# Altium PCB LOAD CONTROL_Final2.PcbDoc (part 1 of 2)
Units mm, origin at the board's own origin, x right, y up, seen from the top; angles counter-clockwise.
Board outline 51.64 x 106.92 mm, 2 copper layers (Top Layer, Bottom Layer); 84 components, 58 nets, 283 pads, 102 vias.
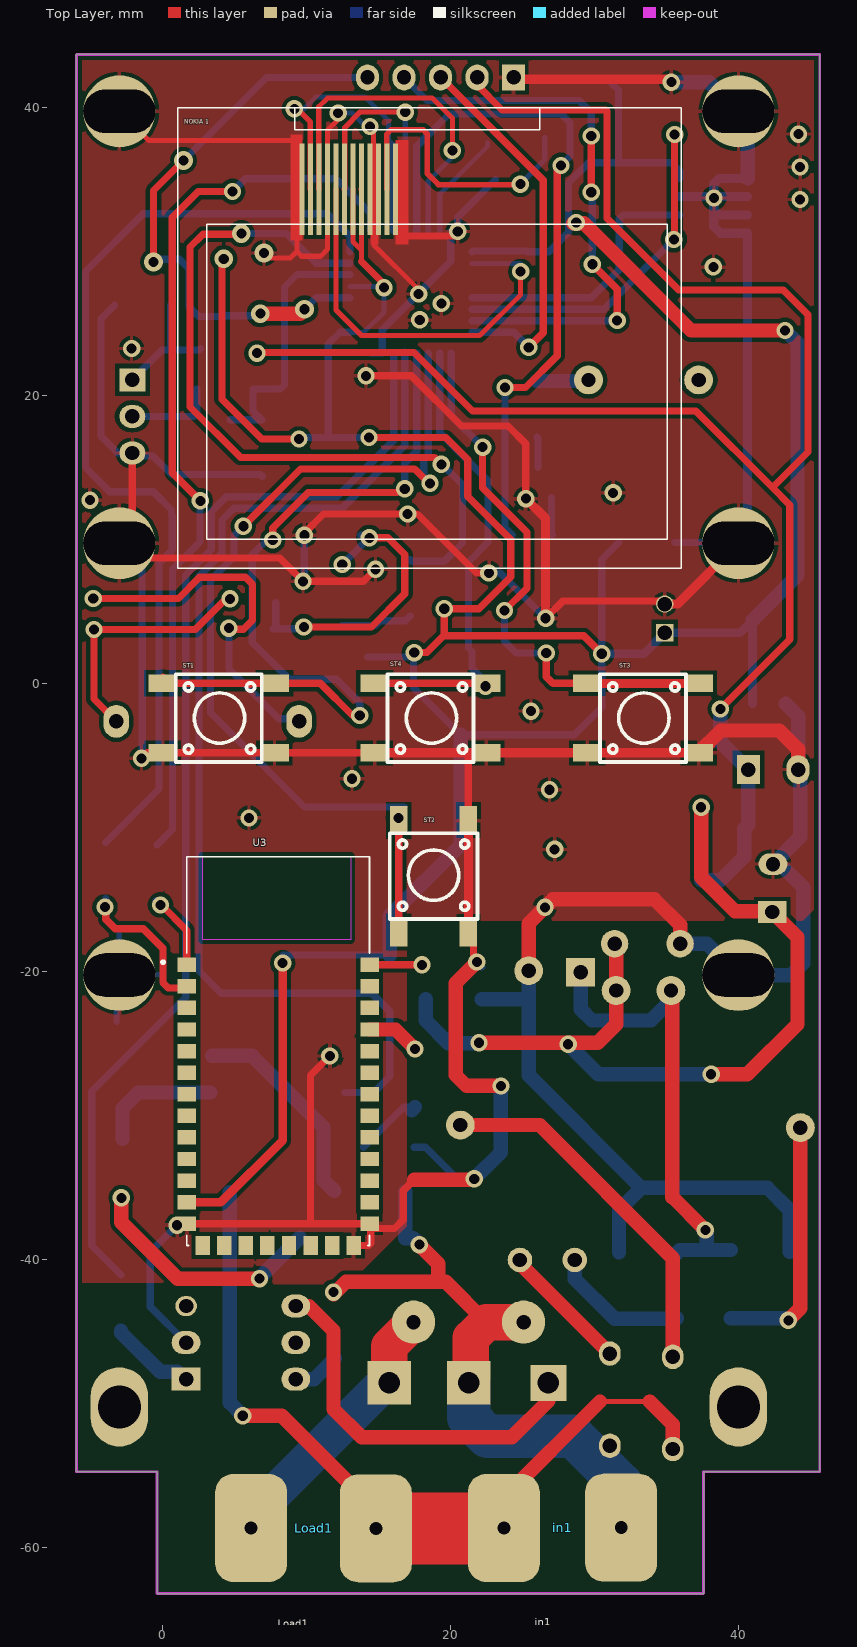
[diagram p0: Top Layer view]
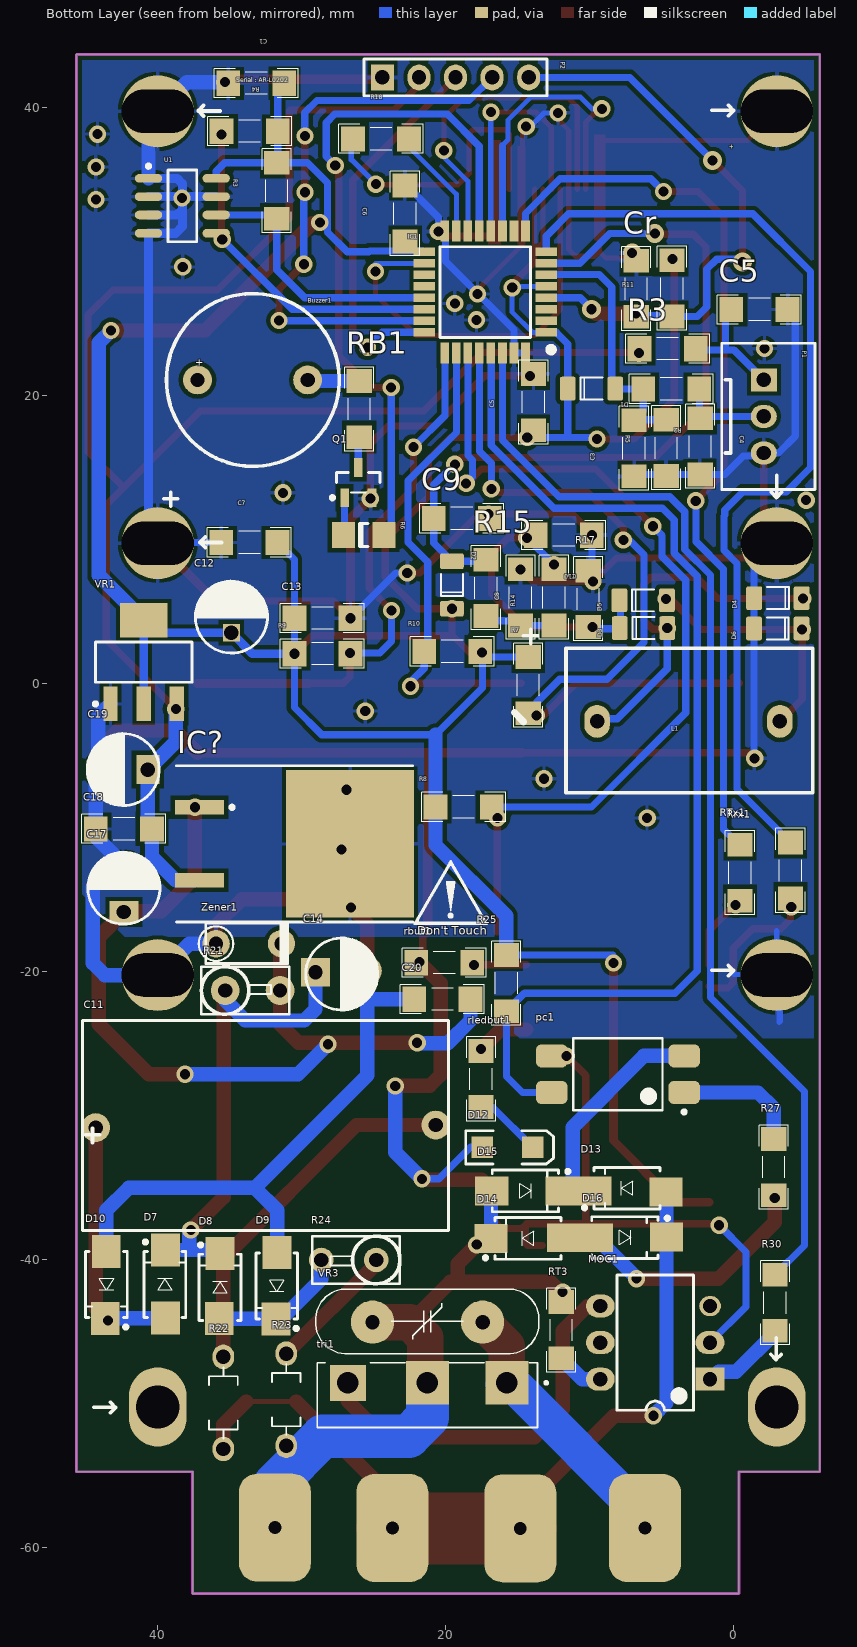
[diagram p1: Bottom Layer view, seen from below]
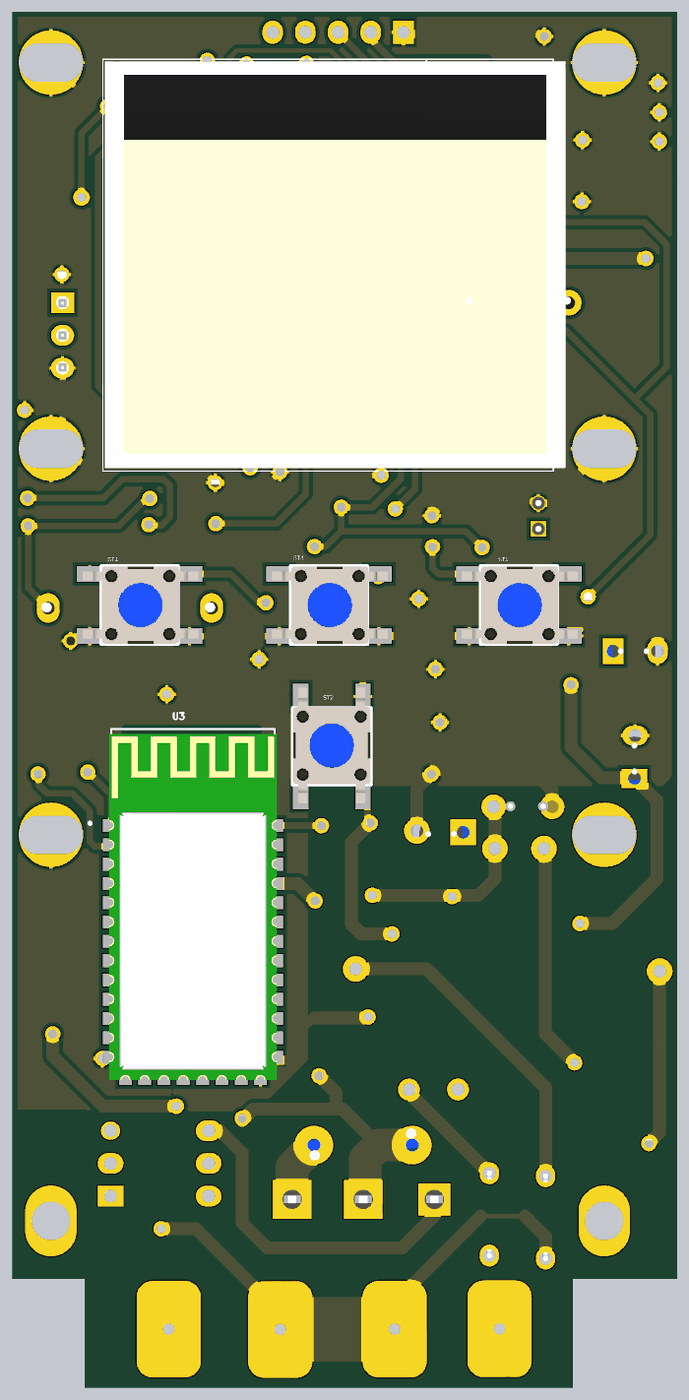
[diagram p2: 3D render of the assembled board from above, using the file's embedded part models]
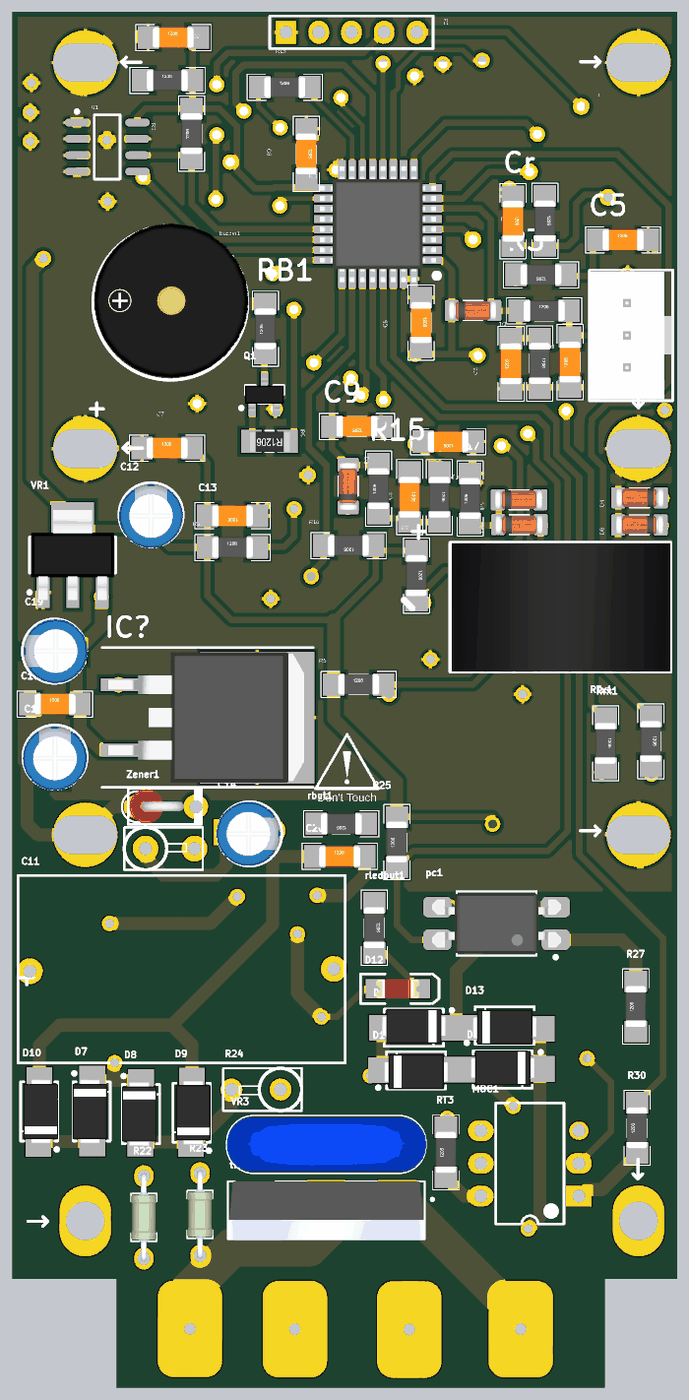
[diagram p3: 3D render of the assembled board from below, using the file's embedded part models]

## Layer stack, top to bottom
Top Solder: solder mask 0.0102, Solder Resist, Dk 3.5
Top Layer: signal copper 0.0356
Dielectric 1: dielectric 0.32, FR-4, Dk 4.8
Bottom Layer: signal copper 0.0356
Bottom Solder: solder mask 0.0102, Solder Resist, Dk 3.5

## Board outline
-0.358,-63.231 -0.358,-54.77 -5.969,-54.77 -5.969,43.686 45.666,43.686 45.666,-54.77 37.592,-54.77 37.592,-63.231

## Design rules (kind name [scope] priority, off if disabled: settings)
Clearance Clearance_15 [InNamedPolygon('GND_L02_P008')] p1: gap=0.3 ignorepadtopadclearanceinfootprint=TRUE
Clearance Clearance_14 [InNamedPolygon('GND_L01_P006')] p2: gap=0.381 ignorepadtopadclearanceinfootprint=TRUE
Clearance Clearance_13 [InNamedPolygon('GND_L01_P006')] p3: gap=0.381 ignorepadtopadclearanceinfootprint=TRUE
Clearance Clearance_12 [InNamedPolygon('GND_L01_P006')] p4: gap=0.2 ignorepadtopadclearanceinfootprint=FALSE
Clearance Clearance_11 [InNamedPolygon('GND_L01_P006')] p5: gap=0.254 ignorepadtopadclearanceinfootprint=FALSE except(0: Arc-Hole Track-Hole SMDPad-Hole THPad-Hole Via-Hole Fill-Hole Poly-Hole Region-Hole Text-Hole)
Clearance Clearance_10 [InNamedPolygon('GND_L02_P008')] p6: gap=0.5 ignorepadtopadclearanceinfootprint=FALSE
Clearance Clearance_9 [InNamedPolygon('GND_L01_P006')] p7: gap=0.5 ignorepadtopadclearanceinfootprint=FALSE
Clearance Clearance_8 [InNamedPolygon('GND_L01_P006')] p8: gap=0.254 ignorepadtopadclearanceinfootprint=FALSE except(0: Arc-Hole Track-Hole SMDPad-Hole THPad-Hole Via-Hole Fill-Hole Poly-Hole Region-Hole Text-Hole)
Clearance Clearance_7 [InNamedPolygon('GND_L01_P006')] p9: gap=0.5 ignorepadtopadclearanceinfootprint=FALSE
Clearance Clearance_6 [InNamedPolygon('GND_L01_P006')] p10: gap=0.254 ignorepadtopadclearanceinfootprint=FALSE except(0: Arc-Hole Track-Hole SMDPad-Hole THPad-Hole Via-Hole Fill-Hole Poly-Hole Region-Hole Text-Hole)
Clearance 0 [InNamedPolygon('GND_L01_P006')] p11: gap=0.254 ignorepadtopadclearanceinfootprint=FALSE except(0: Arc-Hole Track-Hole SMDPad-Hole THPad-Hole Via-Hole Fill-Hole Poly-Hole Region-Hole Text-Hole)
Clearance Clearance_5 [InNamedPolygon('GND_L01_P006')] p12: gap=0.254 ignorepadtopadclearanceinfootprint=FALSE except(0: Arc-Hole Track-Hole SMDPad-Hole THPad-Hole Via-Hole Fill-Hole Poly-Hole Region-Hole Text-Hole)
Clearance Clearance_4 [InNamedPolygon('GND-E_L02_P002')] p13: gap=0.508 ignorepadtopadclearanceinfootprint=FALSE
Clearance Clearance_3 [InNamedPolygon('GND_L01_P001')] p14: gap=0.635 ignorepadtopadclearanceinfootprint=FALSE
Clearance Clearance_2 [InNamedPolygon('GND_L02_P000')] p15: gap=0.508 ignorepadtopadclearanceinfootprint=FALSE
Clearance Clearance_1 [InNamedPolygon('Bottom Layer-GND')] p16: gap=0.356 ignorepadtopadclearanceinfootprint=FALSE
Clearance [All] p17: gap=0.3 ignorepadtopadclearanceinfootprint=FALSE
PolygonConnect PolygonConnect_14 [All vs IsNamedPolygon('GND_L02_P008')] p1: thpad.connectstyle=Relief thpad.reliefconductorwidth=0.762 thpad.reliefentries=4 thpad.polygonreliefangle="90 Angle" thpad.airgapwidth=0.254 smdpad.connectstyle=Relief smdpad.reliefconductorwidth=0.508 smdpad.reliefentries=4 smdpad.polygonreliefangle="90 Angle" smdpad.airgapwidth=0.254 via.connectstyle=Direct via.reliefconductorwidth=0.254 via.reliefentries=4 via.polygonreliefangle="90 Angle" via.airgapwidth=0.254
PolygonConnect PolygonConnect_13 [All vs IsNamedPolygon('GND_L01_P006')] p2: thpad.connectstyle=Relief thpad.reliefconductorwidth=0.889 thpad.reliefentries=4 thpad.polygonreliefangle="90 Angle" thpad.airgapwidth=0.254 smdpad.connectstyle=Relief smdpad.reliefconductorwidth=0.635 smdpad.reliefentries=4 smdpad.polygonreliefangle="90 Angle" smdpad.airgapwidth=0.254 via.connectstyle=Direct via.reliefconductorwidth=0.254 via.reliefentries=4 via.polygonreliefangle="90 Angle" via.airgapwidth=0.254
PolygonConnect PolygonConnect_12 [All vs IsNamedPolygon('GND_L01_P006')] p3: thpad.connectstyle=Relief thpad.reliefconductorwidth=0.889 thpad.reliefentries=4 thpad.polygonreliefangle="90 Angle" thpad.airgapwidth=0.254 smdpad.connectstyle=Relief smdpad.reliefconductorwidth=0.508 smdpad.reliefentries=4 smdpad.polygonreliefangle="90 Angle" smdpad.airgapwidth=0.254 via.connectstyle=Direct via.reliefconductorwidth=0.254 via.reliefentries=4 via.polygonreliefangle="90 Angle" via.airgapwidth=0.254
PolygonConnect PolygonConnect_11 [All vs IsNamedPolygon('GND_L01_P006')] p4: thpad.connectstyle=Relief thpad.reliefconductorwidth=0.508 thpad.reliefentries=4 thpad.polygonreliefangle="90 Angle" thpad.airgapwidth=0.254 smdpad.connectstyle=Relief smdpad.reliefconductorwidth=0.508 smdpad.reliefentries=4 smdpad.polygonreliefangle="90 Angle" smdpad.airgapwidth=0.254 via.connectstyle=Direct via.reliefconductorwidth=0.254 via.reliefentries=4 via.polygonreliefangle="90 Angle" via.airgapwidth=0.254
PolygonConnect PolygonConnect_10 [All vs IsNamedPolygon('GND_L01_P006')] p5: thpad.connectstyle=Relief thpad.reliefconductorwidth=0.254 thpad.reliefentries=4 thpad.polygonreliefangle="90 Angle" thpad.airgapwidth=0.254 smdpad.connectstyle=Relief smdpad.reliefconductorwidth=0.254 smdpad.reliefentries=4 smdpad.polygonreliefangle="90 Angle" smdpad.airgapwidth=0.254 via.connectstyle=Direct via.reliefconductorwidth=0.254 via.reliefentries=4 via.polygonreliefangle="90 Angle" via.airgapwidth=0.254
PolygonConnect PolygonConnect_9 [All vs IsNamedPolygon('GND_L01_P006')] p6: thpad.connectstyle=Direct thpad.reliefconductorwidth=0.254 thpad.reliefentries=4 thpad.polygonreliefangle="90 Angle" thpad.airgapwidth=0.254 smdpad.connectstyle=Relief smdpad.reliefconductorwidth=0.254 smdpad.reliefentries=4 smdpad.polygonreliefangle="90 Angle" smdpad.airgapwidth=0.254 via.connectstyle=Relief via.reliefconductorwidth=0.254 via.reliefentries=4 via.polygonreliefangle="90 Angle" via.airgapwidth=0.254
PolygonConnect PolygonConnect_8 [All vs IsNamedPolygon('GND_L01_P006')] p7: connectstyle=Relief reliefconductorwidth=0.254 reliefentries=4 polygonreliefangle="90 Angle" airgapwidth=0.254
PolygonConnect PolygonConnect_7 [All vs IsNamedPolygon('GND_L02_P008')] p8: connectstyle=Relief reliefconductorwidth=0.254 reliefentries=4 polygonreliefangle="90 Angle" airgapwidth=0.254
PolygonConnect PolygonConnect_6 [All vs IsNamedPolygon('GND_L02_P008')] p9: connectstyle=Direct reliefconductorwidth=0.254 reliefentries=4 polygonreliefangle="90 Angle" airgapwidth=0.254
PolygonConnect PolygonConnect_5 [All vs IsNamedPolygon('GND_L02_P008')] p10: thpad.connectstyle=Direct thpad.reliefconductorwidth=0.254 thpad.reliefentries=4 thpad.polygonreliefangle="90 Angle" thpad.airgapwidth=0.254 smdpad.connectstyle=Relief smdpad.reliefconductorwidth=0.254 smdpad.reliefentries=4 smdpad.polygonreliefangle="90 Angle" smdpad.airgapwidth=0.254 via.connectstyle=Relief via.reliefconductorwidth=0.254 via.reliefentries=4 via.polygonreliefangle="90 Angle" via.airgapwidth=0.254
PolygonConnect PolygonConnect_4 [All vs IsNamedPolygon('GND-E_L02_P002')] p11: thpad.connectstyle=Relief thpad.reliefconductorwidth=0.635 thpad.reliefentries=4 thpad.polygonreliefangle="90 Angle" thpad.airgapwidth=0.254 smdpad.connectstyle=Relief smdpad.reliefconductorwidth=0.381 smdpad.reliefentries=4 smdpad.polygonreliefangle="90 Angle" smdpad.airgapwidth=0.254 via.connectstyle=Direct via.reliefconductorwidth=0.254 via.reliefentries=4 via.polygonreliefangle="90 Angle" via.airgapwidth=0.254
PolygonConnect PolygonConnect_3 [All vs IsNamedPolygon('GND_L01_P001')] p12: thpad.connectstyle=Relief thpad.reliefconductorwidth=0.635 thpad.reliefentries=4 thpad.polygonreliefangle="90 Angle" thpad.airgapwidth=0.254 smdpad.connectstyle=Relief smdpad.reliefconductorwidth=0.635 smdpad.reliefentries=4 smdpad.polygonreliefangle="90 Angle" smdpad.airgapwidth=0.254 via.connectstyle=Direct via.reliefconductorwidth=0.254 via.reliefentries=4 via.polygonreliefangle="90 Angle" via.airgapwidth=0.254
PolygonConnect PolygonConnect_2 [All vs IsNamedPolygon('GND_L02_P000')] p13: thpad.connectstyle=Relief thpad.reliefconductorwidth=0.635 thpad.reliefentries=4 thpad.polygonreliefangle="90 Angle" thpad.airgapwidth=0.254 smdpad.connectstyle=Relief smdpad.reliefconductorwidth=0.254 smdpad.reliefentries=4 smdpad.polygonreliefangle="90 Angle" smdpad.airgapwidth=0.381 via.connectstyle=Direct via.reliefconductorwidth=0.254 via.reliefentries=4 via.polygonreliefangle="90 Angle" via.airgapwidth=0.254
PolygonConnect PolygonConnect_1 [All vs IsNamedPolygon('Bottom Layer-GND')] p14: thpad.connectstyle=Relief thpad.reliefconductorwidth=0.635 thpad.reliefentries=4 thpad.polygonreliefangle="90 Angle" thpad.airgapwidth=0.254 smdpad.connectstyle=Relief smdpad.reliefconductorwidth=0.381 smdpad.reliefentries=4 smdpad.polygonreliefangle="90 Angle" smdpad.airgapwidth=0.254 via.connectstyle=Direct via.reliefconductorwidth=0.254 via.reliefentries=4 via.polygonreliefangle="90 Angle" via.airgapwidth=0.254
PolygonConnect [All] p15: connectstyle=Relief reliefconductorwidth=0.254 reliefentries=4 polygonreliefangle="90 Angle" airgapwidth=0.254
RoutingVias [All] p1: holewidth=0.7 width=1.3 viastyle="Through Hole" minholewidth=0.7 minwidth=1.3 maxholewidth=0.7 maxwidth=1.3
SolderMaskExpansion [All] p1: expansion=0.102
Width [All] p1: maxlimit=5 minlimit=0.35 preferedwidth=1
30 further rules are at their usual default settings.

## Components (designator, comment, footprint, x,y, rotation, side; value= is the part's Value field where it differs from the comment)
Buzzer1 "Buzzer" BUZZER 33.579,20.98 r90 bottom
C1 "0.1uF" CAPC4817X12N 33.172,41.681 r180 bottom
C3 "0.1uF" CAPC4817X12N 6.934,16.332 r90 bottom
C4 "0.1uF" CAPC4817X12N 2.337,16.459 r90 bottom
C5 "0.1uF" CAPC4817X12N 13.919,19.533 r270 bottom
C5 "0.1uF" CAPC4817X12N -1.778,25.959 r180 bottom
C6 "0.1uF" CAPC4817X12N 22.835,32.639 r270 bottom
C7 "0.1uF" CAPC4817X12N 33.649,9.779 r180 bottom
C8 "0.1uF" CAPC4817X12N 14.808,5.969 r270 bottom
C9 "0.1uF" CAPC4817X12N 18.898,11.455 r0 bottom
C10 "0.1uF" CAPC4817X12N 11.811,10.287 r0 bottom
C11 "Cap" RAD-0.3 33.172,-33.477 r0 bottom value=1.5uf
C12 "1uF" "Cap electrolitic radial 5x11-2"#1 34.9,4.505 r90 bottom
C13 "0.1uF" CAPC4817X12N 28.575,4.521 r0 bottom
C14 "1uF" "Cap electrolitic radial 5x11-2"#2 27.33,-20.193 r180 bottom
C17 "1uF" "Cap electrolitic radial 5x11-2"#3 42.367,-14.326 r90 bottom
C18 "0.1uF" CAPC4817X12N 42.367,-10.109 r180 bottom
C19 "1uF" "Cap electrolitic radial 5x11-2"#4 42.316,-5.994 r0 bottom
C20 "0.1uF" CAPC4817X12N 20.244,-21.946 r180 bottom
Cr "0.1uF" CAPC4817X12N 6.782,27.407 r270 bottom
D1 "1N4148UR-1" "SOD80, LL-34" 9.881,20.472 r180 bottom
D2 "1N4148UR-1" "SOD80, LL-34" 19.583,6.833 r90 bottom
D3 "1N4148UR-1" "SOD80, LL-34" 6.273,3.835 r180 bottom
D4 "1N4148UR-1" "SOD80, LL-34" -3.061,5.918 r0 bottom
D5 "1N4148UR-1" "SOD80, LL-34" 6.299,5.766 r180 bottom
D6 "1N4148UR-1" "SOD80, LL-34" -3.047,3.81 r0 bottom
D7 "1n4007" DIOM4629X24N#1 39.522,-41.758 r90 bottom
D8 "1n4007" DIOM4629X24N#2 35.687,-41.961 r90 bottom
D9 "1n4007" DIOM4629X24N#3 31.75,-41.859 r270 bottom
D10 "1n4007" DIOM4629X24N#4 43.586,-41.758 r270 bottom
D12 "SMD 1206 LED" "LED 1206" 15.723,-32.233 r180 bottom
D13 "1n4007" DIOM4629X24N#5 7.417,-35.077 r0 bottom
D14 "1n4007" DIOM4629X24N#6 14.3,-38.557 r0 bottom
D15 "1n4007" DIOM4629X24N#7 14.478,-35.255 r180 bottom
D16 "1n4007" DIOM4629X24N#8 7.569,-38.506 r180 bottom
IC1 "STM32F030K6T6TR" QFP80P900X900X160-32N 17.272,27.178 r0 bottom
IC? "L78M05" TO-263 31.877,-11.151 r270 bottom
in1 "220vIn" HDR1X2#1 6.756,-60.604 r180 top
L1 "0" ZMC 3.023,-2.642 r0 bottom value=300uH
Load1 "Header 2" HDR1X2#2 7.188,-66.319 r180 top
MOC1 "MOC3021-3" DIP-6 5.461,-45.796 r0 bottom
"NOKIA 1" "LCD2" "LCD NOKIA 1202" 18.732,23.98 r0 top
P1 "Header 3" 3PIN -2.083,18.542 r270 bottom
P2 "Header 5" HDR1X5 24.409,42.088 r180 bottom
pc1 "PC817" "SMT Gullwing Lead-Form" 8.052,-27.153 r0 bottom
Q1 "BC817" SOT23_N 26.086,13.945 r90 bottom
R2 "1K" RESC4817X04N 4.343,20.447 r180 bottom value=1k
R3 "1K" RESC4817X04N 31.75,34.214 r90 bottom value=1k
R3 "1K" RESC4817X04N 4.597,23.241 r0 bottom value=1k
R4 "1K" RESC4817X04N 33.63,38.354 r180 bottom value=1k
R5 "1K" RESC4817X04N 4.699,16.358 r270 bottom value=1k
R6 "Res Semi" R1206 25.629,10.363 r90 bottom value=1k
R7 "1K" RESC4817X04N 14.275,-0.127 r270 bottom value=1k
R8 "1K" RESC4817X04N 18.771,-8.585 r180 bottom value=1k
R9 "1K" RESC4817X04N 28.575,2.057 r180 bottom value=1k
R10 "1K" RESC4817X04N 19.558,2.21 r0 bottom value=1k
R11 "1K" RESC4817X04N 4.293,27.432 r270 bottom value=1k
R14 "1K" RESC4817X04N 12.497,5.969 r270 bottom value=1k
R15 "1K" RESC4817X04N 17.221,6.629 r90 bottom value=1k
R17 "1K" RESC4817X04N 10.109,5.867 r90 bottom value=1k
R18 "1K" RESC4817X04N 24.511,37.821 r180 bottom value=1k
R21 "10r" RES-(1/2)-Stand#1 35.331,-21.336 r180 bottom
R22 "1614997-1" RESAD640W45L370D200 35.458,-49.987 r90 bottom
R23 "1614997-1" RESAD640W45L370D200 31.09,-49.759 r90 bottom
R24 "10r" RES-(1/2)-Stand#2 24.841,-40.056 r0 bottom
R25 "1K" RESC4817X04N 15.799,-20.828 r90 bottom value=1k
R27 "100K" RESC4817X04N -2.769,-33.604 r90 bottom value=100k
R30 "1K" RESC4817X04N -2.87,-43.028 r90 bottom
RB1 "1K" RESC4817X04N 26.016,19.05 r90 bottom value=1k
rbut1 "10k" RESC4817X04N 20.117,-19.406 r0 bottom
rledbut1 "10k" RESC4817X04N 17.551,-27.483 r270 bottom
Rrx1 "330r" RESC4817X04N -0.432,-13.157 r270 bottom
RT3 "330r" RESC4817X04N 11.989,-44.933 r90 bottom
RTx1 "330r" RESC4817X04N -3.937,-13.005 r270 bottom
ST1 "SW-PB" "PUSH BOTTOM 6*6" 3.974,-2.286 r90 top
ST2 "SW-PB" "PUSH BOTTOM 6*6" 18.716,-13.327 r180 top
ST3 "SW-PB" "PUSH BOTTOM 6*6" 33.451,-2.286 r90 top
ST4 "SW-PB" "PUSH BOTTOM 6*6" 18.694,-2.286 r90 top
tri1 "BTA41" TO552P1530X450X2110-3B 21.285,-48.59 r0 bottom
U1 "Serial EEPROM(24C04)" SO8_L 38.308,33.17 r180 bottom
U3 "HC-05" XCVR_HC-05 8.052,-25.869 r0 top
VR1 "AMS1117-xx" SOT-223 40.996,1.473 r270 bottom
VR3 "xxDxxx" "14D XXX" 21.285,-44.323 r180 bottom
Zener1 "Diode Zener" "Diode 1W_Stand" 33.985,-18.059 r180 bottom

## Footprints (in the part's own frame and the unit in brackets; to place one, negate y for a bottom-side part, rotate by r counter-clockwise, add the part's x,y. Pads: shape width x height; smd on the part's side, far side on the other; paste and mask are expansions set on the pad)
3PIN [mm]
  rect 1.6x1.8 hole 1: 1(-2.54,0)
  oval 1.6x1.8 hole 1: 2(0,0) 3(2.54,0)
  silkscreen extent -5.08,-2.92 5.08,3.56, body extent -4.95,-2.9 4.95,3.49, height 7
"14D XXX" [mm] "MOV-14DxxxK Metal Oxide Varistors (MOVs) are 14 mm-Design:Abbas Basereh"
  round 3 hole 1: 1(3.836,-0.051) 2(-3.81,-0.051)
  silkscreen extent -7.75,-2.25 7.75,2.25, body extent -7.73,-2.1 7.77,2.1, height 19.5
BUZZER [mm]
  round 2 hole 1: 1(0.092,3.675) 2(0.092,-3.975)
  silkscreen extent -5.91,-6.17 6.09,5.83, body extent -5.75,-6.25 6.25,5.75, height 9.5
"Cap electrolitic radial 5x11-2"#1 [mm] "Cap electrolitic radial 5x11-2-Design:Abbas Basereh"
  rect 1.2x1.2 hole 1: 1(-1,0)
  round 1.2 hole 1: 2(1,0)
  silkscreen extent -2.4,-2.5 2.6,2.5, body extent -2.5,-2.5 2.5,2.5, height 11.3
"Cap electrolitic radial 5x11-2"#2 [mm] "Cap electrolitic radial 5x11-2-Design:Abbas Basereh"
  rect 2x2 hole 1: 1(-1.727,0.127)
  round 2 hole 1: 2(1.88,0.229)
  silkscreen extent -2.4,-2.5 2.6,2.5, body extent -2.5,-2.5 2.5,2.5, height 11.3
"Cap electrolitic radial 5x11-2"#3 [mm] "Cap electrolitic radial 5x11-2-Design:Abbas Basereh"
  rect 1.5x2 hole 1: 1(-1.559,0)
  oval 1.5x2 hole 1: 2(1.769,0.051)
  silkscreen extent -2.4,-2.5 2.6,2.5, body extent -2.5,-2.5 2.5,2.5, height 11.3
"Cap electrolitic radial 5x11-2"#4 [mm] "Cap electrolitic radial 5x11-2-Design:Abbas Basereh"
  rect 1.6x2 hole 1: 1(-1.61,0)
  oval 1.6x2 hole 1: 2(1.845,0)
  silkscreen extent -2.4,-2.5 2.6,2.5, body extent -2.5,-2.5 2.5,2.5, height 11.3
CAPC4817X12N [mm] "Chip Capacitor, 2-Leads, Body 4/80x1/70mm, IPC Medium Density-Design:Abbas Basereh"
  rect 1.65x1.75 smd: 1(-1.95,0) 2(1.95,0)
  silkscreen extent -2.92,-1.02 2.92,1.02, body extent -1.6,-0.8 1.6,0.8, height 1
"Diode 1W_Stand" [mil]
  round 75 hole 39.37: 1(-78,-1) 2(101,-1)
  silkscreen extent -125,-55 118,55, body extent -103,-52 65,53, height 291
DIOM4629X24N#1 [mm] "Molded Diode, 2-Leads, Body 4/60x2/90mm, IPC Medium Density-Design:Abbas Basereh"
  rect 2.3x2 smd: 1(-2.337,-0.051) 2(2.395,-0.051)
  silkscreen extent -2.3,-1.45 3.07,1.48, body extent -2.5,-1.22 2.5,1.48, height 2.2
DIOM4629X24N#2 [mm] "Molded Diode, 2-Leads, Body 4/60x2/90mm, IPC Medium Density-Design:Abbas Basereh"
  rect 2.3x2 smd: 1(-2.152,0.05) 2(2.344,-0.001)
  silkscreen extent -2.3,-1.45 3.07,1.48, body extent -2.5,-1.22 2.5,1.48, height 2.2
DIOM4629X24N#3 [mm] "Molded Diode, 2-Leads, Body 4/60x2/90mm, IPC Medium Density-Design:Abbas Basereh"
  rect 2.3x2 smd: 1(-2.33,0.025) 2(2.286,-0.051)
  silkscreen extent -2.3,-1.45 3.07,1.47, body extent -2.5,-1.22 2.5,1.48, height 2.2
DIOM4629X24N#4 [mm] "Molded Diode, 2-Leads, Body 4/60x2/90mm, IPC Medium Density-Design:Abbas Basereh"
  rect 2.3x2 smd: 1(-2.286,0) 2(2.362,-0.076)
  silkscreen extent -2.3,-1.45 3.07,1.47, body extent -2.5,-1.22 2.5,1.48, height 2.2
DIOM4629X24N#5 [mm] "Molded Diode, 2-Leads, Body 4/60x2/90mm, IPC Medium Density-Design:Abbas Basereh"
  rect 2.3x2 smd: 1(-2.718,0.254) 2(2.235,0.178)
  silkscreen extent -2.3,-1.45 3.08,1.47, body extent -2.5,-1.22 2.5,1.48, height 2.2
DIOM4629X24N#6 [mm] "Molded Diode, 2-Leads, Body 4/60x2/90mm, IPC Medium Density-Design:Abbas Basereh"
  rect 2.3x2 smd: 1(-2.464,-0.051) 2(2.565,0)
  silkscreen extent -2.3,-1.45 3.08,1.47, body extent -2.5,-1.22 2.5,1.48, height 2.2
DIOM4629X24N#7 [mm] "Molded Diode, 2-Leads, Body 4/60x2/90mm, IPC Medium Density-Design:Abbas Basereh"
  rect 2.3x2 smd: 1(-2.337,0) 2(2.54,0)
  silkscreen extent -2.3,-1.45 3.07,1.47, body extent -2.5,-1.22 2.5,1.48, height 2.2
DIOM4629X24N#8 [mm] "Molded Diode, 2-Leads, Body 4/60x2/90mm, IPC Medium Density-Design:Abbas Basereh"
  rect 2.3x2 smd: 1(-1.981,0) 2(2.896,0.051)
  silkscreen extent -2.3,-1.45 3.07,1.47, body extent -2.5,-1.22 2.5,1.48, height 2.2
DIP-6 [mm] "DIP; 6 Leads; Row Spacing 7.62 mm; Pitch 2.54 mm"
  rect 2x1.6 hole 1: 1(-3.81,2.54)
  oval 2x1.6 hole 1: 2(-3.81,0) 4(3.81,-2.54) 5(3.81,0) 6(3.81,2.54)
  oval 1.5x1.4 hole 1: 3(-3.81,-2.54)
  silkscreen extent -2.65,-4.7 2.65,4.7
HDR1X2#1 [mm] "Connector; Header; 2 Position"
  rrect50% 5x7.5 hole 0.9: 1(-25.121,-1.956) 2(-16.967,-1.93)
HDR1X2#2 [mm] "Connector; Header; 2 Position"
  rrect50% 5x7.5 hole 0.9: 1(-7.645,-7.62) 2(1.016,-7.645)
HDR1X5 [mm] "Connector; Header; 5 Position"
  rect 1.6x1.8 hole 1: 1(0,0)
  oval 1.6x1.8 hole 1: 2(2.54,0) 3(5.08,0) 4(7.62,0) 5(10.16,0)
  silkscreen extent -1.27,-1.27 11.43,1.27
"LCD NOKIA 1202" [mm]
  rect 0.35x6.35 smd: 1(-9.039,10.344) 2(-8.448,10.344) 3(-7.857,10.344) 4(-7.267,10.344) 5(-6.676,10.344) 6(-6.085,10.344) 7(-5.494,10.344) 8(-4.903,10.344) 9(-4.312,10.344) 10(-3.721,10.344) 11(-3.13,10.344) 12(-2.539,10.344)
  silkscreen extent -17.68,-15.99 17.32,16.01, body extent -17.52,-15.75 18.28,15.85, height 2.51
"LED 1206" [mm]
  rect 1.5x1.5 smd: 1(-1.75,0) 2(1.75,0)
  silkscreen extent -2.9,-1.15 3.2,1.15, body extent -1.65,-0.72 1.65,0.73, height 1.36
"PUSH BOTTOM 6*6" [mm]
  rect 1.2x2 smd: 1(-2.54,3.937) 1(-2.54,-3.81) 2(2.286,-3.81) 2(2.286,3.937)
  silkscreen extent -3.18,-2.92 2.92,3.05, body extent -3.13,-4.5 2.87,4.5, height 4.2
QFP80P900X900X160-32N [mm] "Integrated Circuit"
  rect 1.475x0.6 smd: 1(-4.238,2.8) 2(-4.238,2) 3(-4.238,1.2) 4(-4.238,0.4) 5(-4.238,-0.4) 6(-4.238,-1.2) 7(-4.238,-2) 8(-4.238,-2.8) 17(4.238,-2.8) 18(4.238,-2) 19(4.238,-1.2) 20(4.238,-0.4) 21(4.238,0.4) 22(4.238,1.2) 23(4.238,2) 24(4.238,2.8)
  rect 0.6x1.475 smd: 9(-2.8,-4.238) 10(-2,-4.238) 11(-1.2,-4.238) 12(-0.4,-4.238) 13(0.4,-4.238) 14(1.2,-4.238) 15(2,-4.238) 16(2.8,-4.238) 25(2.8,4.238) 26(2,4.238) 27(1.2,4.238) 28(0.4,4.238) 29(-0.4,4.238) 30(-1.2,4.238) 31(-2,4.238) 32(-2.8,4.238)
  silkscreen extent -4.77,-3.15 3.15,4.2, body extent -4.5,-4.5 4.5,4.5, height 1.6
R1206 [mm]
  rect 1.8x1.6 smd: 1(-0.059,1.469) 2(-0.059,-1.331)
  silkscreen extent -0.86,-0.23 0.74,0.37, body extent -0.89,-1.56 0.71,1.64, height 0.85
RAD-0.3 [mm] "Radial Cap, Thru-Hole; 2 Leads; 0.3 in Pin Spacing"
  round 2 hole 1: 1(-12.471,-2.794) 2(11.151,-2.616)
  silkscreen extent -13.36,-10.06 12.06,4.52
RES-(1/2)-Stand#1 [mm]
  round 2 hole 1: 1(0,0) 2(3.81,0)
  silkscreen extent -1.65,-1.65 4.44,1.65, body extent -1.68,-1.67 4.14,1.67, height 11
RES-(1/2)-Stand#2 [mm]
  round 1.7 hole 1: 1(0,0) 2(3.81,0)
  silkscreen extent -1.65,-1.65 4.44,1.65, body extent -1.68,-1.67 4.14,1.67, height 11
RESAD640W45L370D200 [mm]
  oval 1.7x1.5 hole 1: 1(-3.2,0) 2(3.2,0)
  silkscreen extent -2.47,-1 2.47,1, body extent -3.42,-1 3.42,1, height 2
RESC4817X04N [mm] "Chip Resistor, 2-Leads, Body 4/80x1/70mm, IPC Medium Density-Design:Abbas Basereh"
  rect 1.65x1.75 smd: 1(-1.95,0) 2(1.95,0)
  silkscreen extent -2.92,-1.02 2.92,1.02, body extent -1.6,-0.8 1.6,0.8, height 1
"SMT Gullwing Lead-Form" [mm] "SOP, 4-Leads, Body 4/65x6/75mm, Pitch 2/54mm, IPC Medium Density designer:abbas basereh"
  rrect50% 2.2x1.6 smd mask+0.06: 1(-4.6,1.27) 2(-4.6,-1.27) 3(4.6,-1.27) 4(4.6,1.27)
  silkscreen extent -4.72,-2.5 3.1,2.74, body extent -5,-2.29 5,2.29, height 3.89
SO8_L [mm] "SOIC, 8-Leads, Body 4.9x3.9mm, Pitch 1.27mm, IPC High Density"
  oval 1.9x0.6 smd: 1(-2.35,1.905) 2(-2.35,0.635) 3(-2.35,-0.635) 4(-2.35,-1.905) 5(2.35,-1.905) 6(2.35,-0.635) 7(2.35,0.635) 8(2.35,1.905)
  silkscreen extent -2.47,-2.5 1,2.88, body extent -2,-2.5 2,2.5, height 1.75
"SOD80, LL-34" [mm] "Diode, MiniMELF"
  round 0.5 on Mech15: 0(0,0)
  rrect25% 1.1x1.65 smd: 1(1.65,0) 2(-1.65,0)
  silkscreen extent -0.76,-0.76 0.76,0.76, body extent -1.88,-0.8 1.82,0.8, height 1.6
SOT23_N [mm] "SOT23, 3-Leads, Body 2.9x1.3mm, Pitch 0.95mm, Lead Span 2.3mm, IPC Medium Density"
  rect 1.3x0.6 smd: 1(-1.05,0.95) 2(-1.05,-0.95) 3(1.05,0)
  silkscreen extent -1.17,-1.5 0.7,1.93, body extent -1.27,-1.5 1.27,1.5, height 1.1
SOT-223 [mm]
  rect 2.4x1 smd: 1(2.9,-2.3) 2(2.9,0) 3(2.9,2.3)
  rect 2.4x3.3 smd: 4(-2.9,0)
  silkscreen extent -1.4,-3.48 3.02,3.35, body extent -3.49,-3.24 3.49,3.24, height 1.64
TO552P1530X450X2110-3B [mm]
  rect 3x3 hole 1.5: 1(-5.525,0) 2(0,0)
  rect 2.5x2.5 hole 1.5: 3(5.525,0)
  silkscreen extent -8.35,-1.4 7.65,3.1, body extent -7.65,-1.4 7.65,3.1, height 21.1
TO-263 [mm] "D2-PAK/TO-263-AB; 3 Leads (1 Cropped); Body 15.9 (inc. leads) x 10.4 mm (LxW max)"
  rect 1x3.4 smd: 1(-2.54,-5.225) 3(2.54,-5.225)
  rect 10.25x8.9 smd: 4(0,5.225)
  silkscreen extent -5.43,-6.83 5.43,9.57, body extent -5.08,-6.4 5.08,8.86, height 4.98
XCVR_HC-05 [mm]
  rect 1.3x1 smd: 1(-6.35,6.325) 2(-6.35,4.825) 3(-6.35,3.325) 4(-6.35,1.825) 5(-6.35,0.325) 6(-6.35,-1.175) 7(-6.35,-2.675) 8(-6.35,-4.175) 9(-6.35,-5.675) 10(-6.35,-7.175) 11(-6.35,-8.675) 12(-6.35,-10.175) 13(-6.35,-11.675) 22(6.35,-11.675) 23(6.35,-10.175) 24(6.35,-8.675) 25(6.35,-7.175) 26(6.35,-5.675) 27(6.35,-4.175) 28(6.35,-2.675) 29(6.35,-1.175) 30(6.35,0.325) 31(6.35,1.825) 32(6.35,3.325) 33(6.35,4.825) 34(6.35,6.325)
  rect 1x1.3 smd: 14(-5.25,-13.175) 15(-3.75,-13.175) 16(-2.25,-13.175) 17(-0.75,-13.175) 18(0.75,-13.175) 19(2.25,-13.175) 20(3.75,-13.175) 21(5.25,-13.175)
  Top Layer keep-out region: 5.029,8.064 -5.258,8.064 -5.258,13.85 5.029,13.85
  silkscreen extent -8.1,-13.18 6.35,13.82, body extent -6.5,-13.45 6.5,13.45, height 2.2
ZMC [mil]
  oval 70x90 hole 39.37: 1(-245,0) 2(255,0)
  silkscreen extent -335,-200 340,195, body extent -334,-199 335,199, height 53

## Part data
C1 C3 C4 C5 C5 C6 C7 C8 C9 C10 C13 C18 C20 Cr: library part "CAP SMD 1206", "CAP 1206", Data=16-12-2016, Desc.="CAP SMD 1206", Designer="Abbas Basereh"
C11: "Capacitor", LatestRevisionDate=17-Jul-2002, LatestRevisionNote="Re-released for DXP Platform.", PackageDescription="Radial Cap, Thru-Hole; 2 Leads; 0.3 in Pin Spacing", PackageReference=RAD-0.3, Published=8-Jun-2000, Publisher="Altium Limited"
C12 C14 C17 C19: library part "Cap ELECTROLITIC TOTAL SIZE", "Cap electrolitic radial", Data=16-12-2016, Designer="Abbas Basereh"
D1 D2 D3 D4 D5 D6: "DIODE GEN PURP 75V 200MA DO213AA", ComponentLink1Description="Manufacturer Link", ComponentLink1URL=http://www.digikey.com/product-detail/en/microsemi-corporation/1N4148UR-1/1N4148UR-1-ND/4377991, ComponentLink2Description=Datasheet, PackageDescription="DIODE GEN PURP 75V 200MA DO213AA", PackageReference=DO-213AA&SOD-80, PackageVersion=2017-1-12, PART.NO=1N4148UR-1, Published=2017-1-12, Publisher="Abbas Basereh"
D7 D8 D9 D10 D13 D14 D15 D16: library part "1n4007 SMD M7", "Standard Rectifiers", Manufacturer="DC COMPONENTS", Data=16-12-2016, Designer="Abbas Basereh", Link=http://www.tme.eu/en/details/m7/smd-universal-diodes/dc-components/, Part. No=M7
D12: library part "LED SMD 1206"
IC1: "Integrated Circuit", Manufacturer_Name=STMicroelectronics, Mouser Part Number=511-STM32F030K6T6TR, Arrow Part Number=STM32F030K6T6TR, Arrow Price/Stock=https://www.arrow.com/en/products/stm32f030k6t6tr/stmicroelectronics, Datasheet Link=http://www.st.com/content/ccc/resource/technical/document/datasheet/a4/5d/0b/0e/87/c4/4d/71/DM00088500.pdf/files/DM00088500.pdf/jcr:content/translations/en.DM00088500.pdf, Height=1.6mm, Manufacturer_Part_Number=STM32F030K6T6TR, Mouser Price/Stock=https://www.mouser.co.uk/ProductDetail/STMicroelectronics/STM32F030K6T6TR/?qs=9MuLHSklicort60U4QZudQ%3D%3D
IC?: "Precision 500mA Regulator"
in1: library part "Header 2", "Header, 2-Pin", LatestRevisionDate=17-Jul-2002, LatestRevisionNote="Re-released for DXP Platform.", Publisher="Altium Limited"
L1: library part Inductor, "Inductor", Code_IEC=1005, Code_JEITA=0402, LatestRevisionDate=29-May-2009, LatestRevisionNote="IPC-7351 Footprint Added.", PackageDescription="Chip Inductor", PackageReference=0402-A, Published=8-Jun-2000, Publisher="Altium Limited"
Load1: "Header, 2-Pin", LatestRevisionDate=17-Jul-2002, LatestRevisionNote="Re-released for DXP Platform.", Publisher="Altium Limited"
MOC1: "Opto-Triac", Designer="Seyed Mohsen Ghasemian", E-mail=picpars@gmail.com, LatestRevisionDate=17-11-2011, Published=17-11-2011, Publisher=www.picpars.com, WEB=www.picpars.com
"NOKIA 1": library part "NOKIA 1202"
P1: "Header, 3-Pin", LatestRevisionDate=17-Jul-2002, LatestRevisionNote="Re-released for DXP Platform.", Publisher="Altium Limited"
P2: "Header, 5-Pin", LatestRevisionDate=17-Jul-2002, LatestRevisionNote="Re-released for DXP Platform.", Publisher="Altium Limited"
pc1: library part PC817XI, "DIP 4pin General Purpose  Photocoupler", ComponentLink1Description="Manufacturer Link", ComponentLink1URL=http://www.roboeq.ir/files/id/233/name/PC817.pdf/, ComponentLink2Description="DIP 4pin General Purpose", DatasheetVersion=2017-2-27, PackageDescription="SOP, 4-Leads, Body 4/65x6/75mm, Pitch 2/54mm, IPC Medium Density designer:abbas basereh", PackageReference="SMT Gullwing Lead-Form", PackageVersion=2017-2-27, Published=2017-2-27, Publisher="Abbas Basereh"
Q1: "45 V, 500 mA NPN general-purpose transistors", ComponentLink1Description="Manufacturer Link", ComponentLink1URL=http://www.nxp.com/, ComponentLink2Description=Datasheet, ComponentLink2URL=http://www.nxp.com/, DatasheetVersion=2017, LatestRevisionDate=2017, LatestRevisionNote="IPC-7351 Footprint Added.", PackageDescription="3-Pin SOT-23 Package 0.95 mm Pitch, 2.3 mm Lead Span", PackageReference=SOT23, PackageVersion=2017-2-8, Published=2017-2-8, Publisher="Abbas Basereh"
R2 R3 R3 R4 R5 R7 R8 R9 R10 R11 R14 R15 R17 R18 R25 R27 R30 RB1 rbut1 rledbut1 Rrx1 RT3 RTx1: library part "RES 1206 0.25W", "RES 1206", Data=16-12-2016, Desc.="RES SMD 1206", Designer="Abbas Basereh"
R6: "Semiconductor Resistor", LatestRevisionDate=17-Jul-2002, LatestRevisionNote="Re-released for DXP Platform.", PackageReference=AXIAL-0.5, Published=8-Jun-2000, Publisher="Altium Limited"
R21 R24: library part "RES DIP PACKAGE", "TOTAL DIP RESISTOR PACK", Designer="Ali Hafizi"
R22 R23: library part LR0204F13K3, "13.3 kOhms ±1% 0.25W, 1/4W Through Hole Resistor Axial - Metal Film", Package="Axial TE Connectivity Passive Product", Check_prices=https://www.snapeda.com/parts/LR0204F13K3/TE/view-part/?ref=eda, MF="TE Connectivity Passive Product", MP=LR0204F13K3, SnapEDA_Link=https://www.snapeda.com/parts/LR0204F13K3/TE/view-part/?ref=snap
ST1 ST2 ST3 ST4: "Switch", LatestRevisionDate=17-Jul-2002, LatestRevisionNote="Re-released for DXP Platform.", PackageDescription="Switch; 2 Leads", PackageReference=SPST-2, Published=24-Mar-1999, Publisher="Altium Limited"
tri1: library part BTA41-600A, "Thyristors, Discretes (diodes, transistors, thyristors ...), Semiconductors and Actives, original, triac, thyristors", Package="TOP-3 STMicroelectronics", Check_prices=https://www.snapeda.com/parts/BTA41-600A/STMicroelectronics/view-part/?ref=eda, MF=STMicroelectronics, MP=BTA41-600A, SnapEDA_Link=https://www.snapeda.com/parts/BTA41-600A/STMicroelectronics/view-part/?ref=snap
U1: library part AT24C512, "EEPROM"
U3: "Bluetooth to Serial Port Module", Package="Module ITead Studio", Check_prices=https://www.snapeda.com/parts/HC-05/ITEAD/view-part/?ref=eda, MF="ITead Studio", MP=HC-05, SnapEDA_Link=https://www.snapeda.com/parts/HC-05/ITEAD/view-part/?ref=snap
VR1: library part AMS1117
VR3: library part "VARISTOR (VDR)", "VARISTORS", Manufacturer=china-canada-philipina, Data=2017-1-5, Designer="Abbas Basereh", Link=digikey.com, Models=MOV-VDR-COV, Publisher="ABBAS BASEREH"
Zener1: "Zener Diode", Voltage="3.3 V", Company=E.P.I.L, Design Date=2011/11/02, Designer="Saeid Jorablo"
Buzzer1: ComponentLinkURL=www.picpars.com, Designer="Seyed Mohsen Ghasemain"

## Free pads (board coordinates)
  oval 4x5.5 hole 3: ""(-2.984,-50.265) ""(40.016,-50.265)
  round 5 hole 3 slot 5 at 0 deg: ""(-2.984,-20.265) ""(-2.984,9.735) ""(-2.984,39.735) ""(40.016,-20.265) ""(40.016,9.735) ""(40.016,39.735)

## Via types
v1: diameter 1.2, hole 0.7, Top Layer to Bottom Layer, 94 vias
v2: diameter 1.3, hole 0.7, Top Layer to Bottom Layer, 7 vias
v3: diameter 1.2, hole 0.7, Top Layer to Bottom Layer, tented both sides, 1 vias

## Nets (pads, with @x,y where several pads share a name; then routed paths per layer and width w, separated by ;. In a path a pad name is that pad's centre, name@x,y a point inside that pad or via, vN(x,y) a via of type N, cw(c..) or ccw(c..) an arc to the next point about the centre after c; other vN are vias at no path point)
9v: C17.1 C20.2 IC?.1 R21.2 Zener1.2 | length 59.1
  Top Layer w1: v1(21.996,-24.968) 30.226,-24.968 ; 30.239,-24.956 31.521,-23.673 R21.2 31.521,-18.186 Zener1.2 ; v1(37.432,-8.611) 37.432,-13.48 39.776,-15.824 42.307,-15.824 C17.1 44.12,-17.637 44.12,-23.673 40.64,-27.153 v1(38.125,-27.153)
  Bottom Layer w1: C20.2 18.294,-23.425 19.863,-24.994 21.971,-24.994 v1(21.996,-24.968) ; v1(28.194,-25.07) 30.277,-27.153 v1(38.125,-27.153)
adc3.4: IC1.10
amper: C9.2 D2.1 IC1.7 R15.2 | length 52.8
  Top Layer w0.5: v2@5.486,30.988 5.283,31.191 2.819,31.191 1.93,30.302 1.93,19.202 5.436,15.697 18.898,15.697 v1(19.38,15.215)
  Bottom Layer w0.5: v2(5.486,31.242) 8.613,31.242 10.677,29.178 IC1.7 ; R15.2 17.318,8.483 D2.1 20.848,9.747 C9.2 20.848,13.798 v1@19.685,14.961 ; v1@19.101,15.215 v1(19.38,15.215)
backlight: IC1.15 R18.2 | length 7.5
  Bottom Layer w0.35: IC1.15 19.272,33.979 22.575,37.281 R18.2@22.575,37.567
buzzer: IC1.13 R6.2 | length 49.3
  Top Layer w0.508: v1(23.8,20.549) 25.222,20.549 27.432,22.758 27.432,35.712 v1(27.686,35.966)
  Bottom Layer w0.508: IC1.13 17.672,37.306 19.908,39.542 27.717,39.542 28.321,38.938 28.321,36.601 v1(27.686,35.966) ; v1(23.8,20.549) 23.8,10.802 R6.2
GND: "NOKIA 1.1" "NOKIA 1.4" "NOKIA 1.9" "NOKIA 1.10" "NOKIA 1.12" C1.1 C3.1 C4.1 C5.1@13.919,21.483 C5.2@-3.728,25.959 C6.1 C7.1 C8.1 C9.1 C10.1 C12.2 C13.1 C14.2 C17.2 C18.1 C19.2 C20.1 Cr.1 D4.1 D6.1 D9.1 D10.1 D12.1 IC1.16 IC1.31 IC1.32 IC?.4 MOC1.2 P1.3 P2.1 pad.@40.016,9.735 pad.@40.016,39.735 pad.@40.016,-20.265 pad.@-2.984,9.735 pad.@-2.984,39.735 pad.@-2.984,-20.265 pc1.3 Q1.2 R5.2 R17.2 rbut1.2 ST1.1 ST2.1 ST3.1 ST4.1 U1.1 U1.2 U1.3 U1.4 U1.7 U3.13 U3.21 U3.22 VR1.1 Zener1.1 | length 496.9
  Top Layer w0.35: pad.@-2.984,39.735 -0.968,37.719 9.296,37.719 ; v2(7.061,29.896) 7.417,29.54 8.89,29.54 9.347,29.997 ; 9.373,31.369 9.347,31.344 9.347,29.997 ; v1(12.217,39.624) 12.217,39.167 11.466,38.415 11.466,34.325 11.466,30.135 10.998,29.667 9.677,29.667 9.347,29.997 ; v1(14.427,38.684) 14.681,38.43 14.681,36.297 ; 14.707,31.09 14.707,30.429 17.805,27.33 v1(17.805,27.051)
  Top Layer w0.5: P1.3 -2.083,10.636 -2.984,9.735 -1.961,8.712 8.153,8.712 v1(9.779,7.087) 13.976,7.087 v1(14.808,7.919) ; v1(-1.448,-5.207) -1.067,-4.826 0.037,-4.826 7.784,-4.826 ST4.1@14.757,-4.826 ; U3.13 10.284,-37.544 ; v1(9.861,10.287) 9.861,10.42 11.201,11.76 v1(17.043,11.76) 17.729,11.76 21.819,7.671 v1(22.682,7.671) ; v1(11.633,-25.883) 10.284,-27.232 10.284,-37.544 ; U3.21 14.321,-39.044 14.478,-38.887 U3.22@14.478,-37.62 ; v1(14.148,21.361) 17.297,21.361 20.777,17.882 24.003,17.882 25.248,16.637 v1(25.248,12.827) ; 16.612,31.064 v1@20.523,31.064 ; 17.501,-34.491 16.739,-35.253 16.739,-37.262 16.129,-37.871 14.729,-37.871 U3.22@14.478,-37.62 ; ST2.1@21.256,-17.264 21.61,-17.617 v1@21.61,-19.355 ; ST2.1@21.256,-9.517 21.256,-4.956 21.387,-4.826 ; v1(26.625,4.521) 27.813,5.709 34.696,5.709 C12.2 ; 10.284,-37.544 U3.22 U3.22@14.478,-37.62
  Top Layer w0.635: ST2.1@21.256,-17.264 ST2.1@21.256,-9.517 ; 21.387,-4.826 14.757,-4.826 29.514,-4.826 ST3.1@37.261,-4.826 ; P2.1@24.409,41.605 24.765,41.961 35.154,41.961 v1(35.357,41.758) ; v1(25.248,12.827) 26.625,11.45 v1(26.625,4.521) ; C12.2 35.786,5.505 pad.@40.016,9.735
  Top Layer w1: 17.501,-34.491 21.593,-34.491 v1(21.666,-34.417) ; v1(21.844,-19.355) 20.371,-20.828 20.371,-27.203 21.133,-27.965 v1(23.52,-27.965) ; C14.2 25.451,-16.688 v1(26.581,-15.557) 27.127,-15.011 34.188,-15.011 35.966,-16.789 Zener1.1 ; ST3.1@37.261,-4.826 38.81,-3.277 42.85,-3.277 44.161,-4.588 C19.2
  Bottom Layer w0.35: pad.@-2.984,-20.265 -2.984,-17.184 -2.997,-17.17 pad.@-2.997,-21.136 ; 0.024,-20.218 -2.08,-20.218 pad.@-2.997,-21.136 ; Cr.1@6.833,29.433 7.27,29.87 7.245,29.896 v2(7.061,29.896) ; v1(12.217,39.624) 13.183,39.624 v1@14.122,38.684 ; pad.@-3.15,-21.996 -2.997,-21.844 pad.@-2.997,-21.136 ; pad.@-3.15,-21.996 -3.226,-22.073 -3.226,-23.495 -3.15,-23.571 pad.@-3.15,-21.996 ; pad.@-3.15,-21.996 -3.15,-21.288 pad.@-2.997,-21.136
  Bottom Layer w0.5: C5.2@-3.322,26.264 -4.267,25.318 -4.267,17.17 -3.099,16.002 P1.3 -1.88,15.799 -0.66,15.799 0.629,14.509 C4.1 6.807,14.509 C3.1 ; pad.@-2.984,9.735 -1.411,8.162 D4.1 -1.411,3.824 D6.1 -1.397,-5.08 -1.524,-5.207 v1(-1.448,-5.207) ; v1(1.016,-37.643) -0.838,-39.497 -0.838,-43.307 MOC1.2 ; v1(9.779,7.087) 9.861,7.169 v1(9.861,10.287) ; C5.1@13.919,21.483 14.027,21.483 v1(14.148,21.361) ; IC1.32 IC1.31 15.272,24.568 20.029,29.326 IC1.16@20.029,31.373 ; D12.1 18.288,-32.233 20.472,-34.417 v1(21.666,-34.417) ; v1(20.523,31.394) 20.523,32.379 C6.1@23.139,34.995 ; v1(21.844,-19.355) rbut1.2@22.194,-19.705 ; v1(22.682,7.671) 23.475,7.671 v1(26.625,4.521) ; C7.1 39.972,9.779 pad.@40.016,9.735 ; pad.@40.016,39.735 pad.@40.658,39.094
  Bottom Layer w0.635: Q1.2 25.203,12.827 v1(25.248,12.827) ; U1.7 v1@38.308,33.805 ; pad.@40.016,9.735 40.658,10.377 U1.4 38.777,31.265 38.308,31.734 38.308,32.907 ; U1.3 38.68,32.535 38.308,32.907 ; U1.2 v1@38.308,33.805 ; U1.1 38.679,35.075 38.308,34.703 38.308,34.48 v1@38.308,33.805 ; 38.308,32.907 v1@38.308,33.805
  Bottom Layer w1: v1(21.666,-34.417) 23.52,-32.563 v1(23.52,-27.965) ; C20.1 25.197,-21.946 25.451,-22.2 ; C14.2 25.451,-22.2 ; D9.1 31.725,-36.601 33.274,-35.052 ; v1(35.357,41.758) 37.994,41.758 pad.@40.016,39.735 ; Zener1.1 37.836,-18.085 40.016,-20.265 43.692,-20.265 44.526,-19.431 44.526,-14.173 42.91,-12.557 C17.2 44.317,-10.658 C18.1 44.317,-6.15 C19.2 44.161,-2.292 VR1.1 ; U1.1 pad.@40.658,39.094 ; D10.1 43.586,-36.601 42.037,-35.052 33.274,-35.052 ; 25.451,-22.2 25.451,-27.229 33.274,-35.052
  other v1: 27.254,-11.532 6.02,-9.347 26.899,-7.391 13.183,-6.629 25.603,-1.93 -5.029,12.725 31.318,13.233 -2.134,23.266 17.882,25.248 19.38,26.391 38.278,28.931 44.298,33.604 38.329,33.706 44.298,35.865 44.196,38.151
INPUT: C3.2 D1.1 IC1.6 R2.1 R5.1 | length 18.6
  Bottom Layer w0.5: R5.1 6.909,18.308 6.293,18.923 R2.1 8.205,20.447 D1.1 8.484,20.725 8.484,27.534 9.35,28.4 IC1.6@13.012,28.4
  Bottom Layer w0.508: IC1.6@13.012,28.4 IC1.6
L: D13.1 D16.2 in1.2 Load1.1 R22.1 | length 57
  Top Layer w0.35: 30.404,-49.886 33.858,-49.886
  Top Layer w1: v1(5.588,-50.876) 8.306,-50.876 14.834,-57.404 Load1.1 ; in1.2 23.724,-56.566 30.404,-49.886 ; 33.858,-49.886 35.458,-51.486 R22.1
  Top Layer w5: Load1.1 23.698,-58.699 in1.2
  Bottom Layer w1: D13.1@4.674,-35.357 D16.2 4.674,-49.962 v1(5.588,-50.876)
LCD-DN: "NOKIA 1.5" IC1.18 | length 28.1
  Top Layer w0.35: 12.057,34.325 12.057,25.928 13.829,24.155 22.047,24.155 24.892,27 v1(24.892,28.6)
  Bottom Layer w0.35: IC1.18 v1@24.892,29.178
LCD-RST: "NOKIA 1.2" IC1.11 | length 21.4
  Top Layer w0.381: v1@9.347,39.929 10.284,38.992 10.284,34.325
  Bottom Layer w0.35: v1(9.169,39.903) 9.844,39.903 10.657,40.716 14.097,40.716 15.697,39.116 15.697,37.744 16.072,37.37
  Bottom Layer w0.5: IC1.11 16.072,37.37
LCD-SCE: "NOKIA 1.3" IC1.14 | length 24.4
  Top Layer w0.35: 10.875,40.059 11.481,40.665 18.745,40.665 20.142,39.268 v1(20.142,37.008)
  Top Layer w0.381: 10.875,34.325 10.875,40.059
  Bottom Layer w0.35: IC1.14 18.472,34.88 20.142,36.551 v1(20.142,37.008)
LCD-SCLK: "NOKIA 1.6" IC1.12 | length 17.2
  Top Layer w0.35: 13.741,39.675 v1(16.872,39.675)
  Top Layer w0.381: 12.648,34.325 12.675,34.352 12.675,38.609 13.741,39.675
  Bottom Layer w0.381: IC1.12 v1(16.872,39.675)
n: D14.2 D15.1 in1.1 R23.1 RT3.2 tri1.2 VR3.2 | length 45.1
  Top Layer w1: v1(11.887,-42.291) 11.887,-42.449 12.757,-41.58 19.05,-41.58 ; v1(17.856,-38.989) 19.177,-40.31 19.177,-41.453 19.05,-41.58 ; 22.504,-44.399 19.685,-41.58 19.05,-41.58
  Top Layer w2.54: tri1.2 21.438,-48.438 21.438,-45.466 22.504,-44.399 ; 22.53,-44.374 VR3.2
  Bottom Layer w1: D15.1@16.866,-35.306 D14.2 17.424,-38.557 v1(17.856,-38.989)
  Bottom Layer w2.54: in1.1 in1.1@31.877,-55.626
  Bottom Layer w3: tri1.2 21.285,-51.003 22.581,-52.299 28.55,-52.299 in1.1@31.877,-55.626
NetBuzzer1_2: Buzzer1.2 RB1.2 | length 3.6
  Bottom Layer w1: RB1.2 29.531,21 Buzzer1.2
NetC5_1: C5.1@0.172,25.959 P1.1 R3.1@2.647,23.241 | length 8.7
  Bottom Layer w0.5: P1.1 0,23.165 0.584,23.165 ; C5.1@0.578,26.264 0.578,23.171 0.584,23.165 ; R3.1@2.647,23.241 2.571,23.165 0.584,23.165
NetC8_2: C8.2 R14.2 R15.1 | length 5
  Bottom Layer w0.5: R14.2 C8.2 15.133,4.343 16.885,4.343 R15.1
NetC10_2: C10.2 D3.2 D5.2 R14.1 R17.1 | length 21.6
  Top Layer w0.5: v1(9.83,3.912) 14.529,3.912 16.84,6.223 16.84,8.941 15.672,10.109 v1(14.376,10.109)
  Bottom Layer w0.5: D5.2@7.874,5.612 7.874,3.976 7.683,3.785 9.703,3.785 v1(9.83,3.912) R17.1@9.83,3.697 ; R14.1 v1(12.497,8.255) 14.351,10.109 v1(14.376,10.109) 14.199,10.287 C10.2
NetC11_1: C11.1 R22.2 | length 25.4
  Top Layer w1: C11.1 26.213,-30.683 35.458,-39.929 R22.2
NetC11_2: C11.2 D7.1 D10.2 | length 17.7
  Top Layer w1: v1(43.485,-44.247) 44.323,-43.409 C11.2
  Bottom Layer w1: D7.1 D10.2@43.485,-44.094
NetC14_1: C14.1 D7.2 D8.2 R21.1 | length 33.8
  Top Layer w1: C14.1 C14.1@29.376,-20.384 ; R21.1 35.433,-21.438 35.433,-35.687 v1(37.719,-37.973)
  Bottom Layer w1: C14.1 29.058,-22.631 29.845,-23.419 33.934,-23.419 35.331,-22.022 R21.1 ; D8.2 35.94,-39.363 37.821,-39.363 ; v1(37.719,-37.973) 37.821,-38.075 37.821,-39.363 ; D7.2 37.821,-39.363
NetD3_1: D3.1 D4.2 L1.2 | length 25.9
  Top Layer w0.5: v1(-4.801,5.893) 1.118,5.893 2.591,7.366 5.776,7.366 6.274,6.869 6.274,4.394 5.639,3.759 4.496,3.759 4.572,3.835 v1(4.623,3.835)
  Bottom Layer w0.5: v1(-4.801,5.893) -4.736,5.893 D4.2 ; v1(4.623,3.835) 4.623,1.016 8.103,-2.464 9.322,-2.464 L1.2
NetD5_1: D5.1 D6.2 L1.1 | length 17.5
  Top Layer w0.5: L1.1@-3.423,-2.4 L1.1@-3.334,-2.311 ; L1.1 -4.75,-1.092 v1(-4.75,3.734) 2.287,3.734 4.421,5.867 v1(4.699,5.867)
NetD8_1: D8.1 D9.2 R24.2 | length 9.5
  Bottom Layer w1: R24.2 28.651,-41.377 31.42,-44.145 D9.2 ; D9.2@31.877,-44.145 35.705,-44.145 D8.1
NetD12_2: D12.2 rledbut1.2 | length 5.1
  Bottom Layer w0.5: D12.2 16.772,-29.433 rledbut1.2
  Bottom Layer w1: rledbut1.2@17.323,-29.661 rledbut1.2
NetD13_2: D13.2 D15.2 pc1.2 | length 14.5
  Bottom Layer w1: pc1.2 6.248,-25.883 11.196,-30.83 11.196,-34.513 D15.2
NetD14_1: D14.1 D16.1 R27.1 | length 16.9
  Top Layer w1: v1(-2.845,-35.738) -2.845,-37.44 1.067,-41.351 v1(6.756,-41.351)
  Bottom Layer w1: v1(6.756,-41.351) 6.756,-41.3 D16.1
NetLoad1_2: Load1.2 tri1.1 VR3.1 | length 19.3
  Top Layer w2.54: tri1.1 15.76,-46.063 VR3.1
  Bottom Layer w2.54: Load1.2 6.172,-57.861 15.316,-48.717 tri1.1@15.977,-48.717
NetMOC1_1: MOC1.1 R30.1 | length 5.2
  Bottom Layer w1: R30.1 -2.87,-45.11 -0.152,-47.828 MOC1.1@1.041,-47.828
NetMOC1_4: MOC1.4 tri1.3 | length 26.8
  Top Layer w1: MOC1.4 10.16,-43.256 11.887,-44.983 11.887,-50.419 13.843,-52.375 24.282,-52.375 26.81,-49.847 tri1.3
NetMOC1_6: MOC1.6 RT3.1 | length 3.3
  Bottom Layer w1: MOC1.6 10.535,-48.336 RT3.1
"NetNOKIA 1_11": "NOKIA 1.11" R18.1 | length 20.3
  Top Layer w0.381: 15.602,34.325 15.602,38.157 15.9,38.456 18.11,38.456 18.39,38.176 18.39,35.433 19.177,34.646 24.841,34.646 v1(24.867,34.671)
  Bottom Layer w0.381: v1(24.867,34.671) 26.568,36.373 R18.1@26.568,37.897
Netpc1_1: pc1.1 R27.2 | length 8.7
  Bottom Layer w1: R27.2 -2.769,-29.515 -1.676,-28.423 pc1.1@3.325,-28.423
NetQ1_1: Q1.1 R6.1 | length 2.6
  Bottom Layer w0.5: Q1.1 27.036,10.366 R6.1
NetQ1_3: Q1.3 RB1.1 | length 2.1
  Bottom Layer w0.5: RB1.1 26.086,17.03 Q1.3
NetR23_2: R23.2 R24.1 | length 8.8
  Top Layer w1: R24.1@24.841,-40.31 R23.2
Netrbut1_1: rbut1.1 U3.34 | length 3.6
  Top Layer w0.5: U3.34 18.02,-19.544 v1(18.034,-19.558)
Netrledbut1_1: rledbut1.1 U3.31 | length 3.7
  Top Layer w1: U3.31 16.195,-24.044 v1(17.551,-25.4)
NetRrx1_2: Rrx1.2 U3.1 | length 5.3
  Top Layer w0.5: v1@-0.099,-15.364 1.702,-17.165 U3.1
  Bottom Layer w0.5: Rrx1.2 -0.147,-15.392 v1(-0.127,-15.392)
NetRTx1_2: RTx1.2 U3.2 | length 10.5
  Top Layer w0.5: v1@-3.937,-15.545 -3.937,-16.383 -3.277,-17.043 -1.321,-17.043 0.037,-18.401 0.037,-20.788 0.406,-21.158 1.588,-21.158 U3.2
  Bottom Layer w0.5: v1(-3.988,-15.545) -3.937,-15.494 RTx1.2
RESET: Cr.2 IC1.4 P2.5 R11.2 | length 40.9
  Top Layer w0.508: v2(-0.61,29.261) -0.61,34.239 v2(1.473,36.322)
  Top Layer w1: v2(6.807,25.679) 9.576,25.679 v2(9.881,25.984)
  Bottom Layer w0.508: v2@-0.61,29.21 v2(-0.61,29.261) -0.406,29.464 1.194,29.464 1.88,28.778 1.88,26.137 2.534,25.482 R11.2 4.343,25.533 Cr.2@6.807,25.533 ; v2(1.473,36.322) 7.239,42.088 P2.5 P2.5@13.97,41.808 ; v2(9.881,25.984) 10.674,26.778 IC1.4
rx: IC1.9 Rrx1.1 | length 62.7
  Top Layer w0.5: v1(2.642,12.675) 0.686,14.63 0.686,32.36 2.489,34.163 v1(4.877,34.163)
  Bottom Layer w0.5: Rrx1.1@-0.356,-11.207 0.711,-10.14 0.711,7.925 2.616,9.83 2.616,12.649 v1(2.642,12.675) ; v1(4.877,34.163) 5.766,35.052 12.065,35.052 14.472,32.645 IC1.9
SCL: IC1.21 R3.1@31.75,32.264 U1.6 | length 18.9
  Bottom Layer w0.5: R3.1@31.75,32.264 32.021,32.535 U1.6
  Bottom Layer w0.508: IC1.21 29.794,26.778 31.75,28.734 R3.1@31.75,32.264 ; U1.6 U1.6@35.964,32.535
SCL1: IC1.19
SDA: IC1.22 R4.1 U1.5 | length 23.6
  Top Layer w0.5: v1(35.535,30.836) 35.585,30.886 v1(35.585,38.125)
  Bottom Layer w0.5: R4.1 35.58,38.131 v1(35.585,38.125)
  Bottom Layer w0.508: IC1.22 30.677,25.978 v1(35.535,30.836)
SDA1: IC1.20
Sens: C4.2 P1.2 R2.2 | length 6.3
  Bottom Layer w0.5: P1.2 2.204,18.542 2.393,18.731 R2.2
sw1: IC1.28 R7.2 ST1.2 | length 54.7
  Top Layer w0.5: v1(7.671,9.957) 7.671,10.795 10.135,13.259 16.281,13.259 16.561,13.538 16.815,13.538 v1(16.84,13.513) ; ST1.2@7.784,0 10.973,0 13.208,-2.235 v1(13.716,-2.235)
  Top Layer w0.508: ST1.2@0.037,0.418 -0.381,0 0.037,0 6.02,0 ; 6.09,-0.07 6.02,0 ; ST1.2@7.784,0 6.02,0
  Bottom Layer w0.5: v1(7.671,9.957) 7.264,9.957 6.248,8.941 6.248,2.845 8.814,0.279 12.09,0.279 13.716,-1.346 v1(13.716,-2.235) ; v1(16.84,13.513) 16.84,15.291 17.672,16.123 IC1.28
SW2: IC1.27 R8.2 ST2.2 | length 62.2
  Top Layer w0.5: v1(5.626,10.909) 9.601,14.884 17.526,14.884 18.517,13.894 v1(18.593,13.894)
  Top Layer w0.508: ST2.2@16.43,-17.264 ST2.2@16.43,-9.517
  Bottom Layer w0.5: v1(5.626,10.909) 4.978,10.262 4.978,8.788 3.344,7.154 3.344,-2.049 9.881,-8.585 R8.2 ; IC1.27 18.472,15.83 18.161,15.519 18.161,14.326 v1(18.593,13.894)
  other v1: 16.408,-9.347
sw3: IC1.25 R9.2 ST3.2 | length 38.5
  Top Layer w0.5: v1(22.25,16.408) 22.25,13.564 25.324,10.49 25.324,6.604 v1(23.774,5.055) ; v1(26.67,2.108) 26.67,0.457 27.127,0 ST3.2@29.514,0
  Top Layer w0.635: ST3.2@29.514,0 ST3.2@37.261,0
  Bottom Layer w0.5: IC1.25 20.072,18.587 v1(22.25,16.408) ; v1(23.774,5.055) 23.774,2.921 24.587,2.108 v1(26.67,2.108)
SW4: IC1.26 R10.2 ST4.2 | length 32.9
  Top Layer w0.5: 19.122,0 19.847,0
  Top Layer w0.508: ST4.2@14.757,0 19.122,0 ; 19.847,0 ST4.2@22.104,0
  Bottom Layer w0.5: IC1.26 19.272,17.431 22.631,14.072 22.631,9.804 21.26,8.433 21.26,2.458 R10.2 21.508,1.047 22.454,0.102 v1(22.454,-0.203)
TCK: IC1.24 P2.3 | length 26.5
  Top Layer w0.508: P2.3 26.467,34.95 26.467,24.359 v1(25.451,23.343)
  Bottom Layer w0.508: IC1.24 24.415,24.378 v1(25.451,23.343)
TMS: IC1.23 P2.4 | length 39.3
  Top Layer w0.508: v1(29.794,34.112) v1(29.794,38.024) ; v1(29.87,29.108) 31.598,27.381 v1(31.598,25.197)
  Bottom Layer w0.508: P2.4 18.39,40.488 28.956,40.488 29.794,39.649 v1(29.794,38.024) ; IC1.23 31.579,25.178 v1(31.598,25.197) ; v1(29.794,34.112) 29.87,34.036 v1(29.87,29.108)
triakPulse: IC1.30 R30.2 | length 78.1
  Bottom Layer w0.5: R30.2 -4.902,-39.046 -4.902,-28.346 1.626,-21.819 1.626,7.518 3.404,9.296 3.404,11.913 4.445,12.954 12.141,12.954 16.072,16.885 IC1.30
tx: IC1.8 RTx1.1 | length 67.6
  Bottom Layer w0.5: RTx1.1 -0.229,-7.346 -0.229,8.331 0.686,9.246 0.686,11.633 0.635,11.684 0.635,12.04 -0.635,13.31 -3.658,13.31 -5.334,14.986 -5.334,28.6 -1.321,32.614 11.481,32.614 13.034,31.06 IC1.8
VCC-3.3v: "NOKIA 1.7" "NOKIA 1.8" C1.2 C5.2@13.919,17.583 C6.2 C7.2 C12.1 C13.2 D1.2 D2.2 IC1.1 IC1.5 IC1.17 R3.2@31.75,36.164 R4.2 R7.1 R8.1 R9.1 R10.1 R11.1 R25.2 U1.8 U3.12 VR1.2 VR1.4 | length 250.2
  Top Layer w0.35: 13.238,34.325 13.238,30.678 13.767,30.15 ; 13.829,29.302 13.829,34.325
  Top Layer w0.5: v2(4.267,29.489) 4.14,29.362 4.14,19.736 6.909,16.967 v1(9.5,16.967) ; 13.829,29.302 15.392,27.739 v3(15.392,27.483) ; v1(14.351,17.069) 19.685,17.069 21.209,15.545 21.209,12.979 24.206,9.982 24.206,7.391 21.997,5.183 v1(19.583,5.183) 19.583,3.353 ; v1(17.501,2.134) 18.364,2.134 19.583,3.353 ; v1(30.525,2.057) 29.28,3.302 19.634,3.302 19.583,3.353
  Top Layer w0.6: U3.12 4.063,-36.044 8.357,-31.75 v1(8.357,-19.431)
  Top Layer w1: v1(28.753,32.004) 28.6,32.004 28.55,31.953 29.286,31.953 36.728,24.511 v1(43.256,24.511)
  Bottom Layer w0.35: IC1.1 13.989,24.378 15.392,25.781 v3(15.392,27.483) 15.297,27.578 IC1.5
  Bottom Layer w0.5: v1@8.382,-18.878 R25.2 ; v1(9.5,16.967) 9.601,17.069 v1(14.351,17.069) 11.531,17.069 D1.2 11.531,23.57 IC1.1@12.338,24.378 ; R7.1 R10.1@17.221,1.823 ; R10.1@17.449,2.051 17.449,-0.305 20.721,-3.576 28.631,-3.576 30.525,-1.682 v1(30.525,2.057) C13.2 30.525,8.605 C7.2 ; C1.2 31.68,41.224 R4.2 31.68,36.234 31.75,36.164 35.363,36.164 35.958,35.569 U1.8
  Bottom Layer w0.508: IC1.1@12.338,24.378 IC1.1 ; IC1.17 21.568,30.036 25.308,30.036 25.366,29.978 26.854,29.978 28.219,31.344 28.219,34.773 29.611,36.164 R3.2@31.75,36.164
  Bottom Layer w0.6: v1(30.525,2.057) 33.452,2.057 C12.1 40.128,3.505 VR1.4 VR1.2
  Bottom Layer w1: R25.2 15.799,-16.154 20.721,-11.233 R8.1 20.721,-3.576 ; VR1.4 44.12,7.497 44.12,23.647 v1(43.256,24.511)
VCC_5V: C18.2 C19.1 IC?.3 P2.2 R3.2@6.547,23.241 VR1.3 | length 120.4
  Top Layer w0.5: v1(6.579,22.936) 6.629,22.987 17.475,22.987 21.539,18.923 37.059,18.923 42.38,13.602 ; P2.2 21.869,41.554 23.597,39.827 30.81,39.827 30.886,39.751 30.886,32.309 35.865,27.33 43.129,27.33 44.856,25.603 44.856,16.078 42.38,13.602 ; v1(38.76,-1.778) 43.586,3.048 43.586,12.395 42.38,13.602
  Bottom Layer w0.5: R3.2@6.547,23.241 6.579,23.272 v1(6.579,22.936)
  Bottom Layer w1: IC?.3@37.432,-13.691 38.76,-13.691 40.417,-12.034 C18.2 40.707,-9.82 C19.1 38.696,-3.983 38.76,-3.918 v1(38.76,-1.778)
VDD: Buzzer1.1
ZeroCross: IC1.29 pc1.4 R25.1 | length 75.9
  Bottom Layer w0.5: pc1.4 14.681,-28.423 15.799,-27.305 R25.1 14.55,-21.529 4.079,-21.529 2.54,-19.99 2.54,7.443 4.14,9.043 4.14,11.354 4.953,12.167 12.497,12.167 16.846,16.516 IC1.29@16.846,22.993
pads on no net: D1.0 D2.0 D3.0 D4.0 D5.0 D6.0 IC1.2 IC1.3 MOC1.3 MOC1.5 U3.3 U3.4 U3.5 U3.6 U3.7 U3.8 U3.9 U3.10 U3.11 U3.14 U3.15 U3.16 U3.17 U3.18 U3.19 U3.20 U3.23 U3.24 U3.25 U3.26 U3.27 U3.28 U3.29 U3.30 U3.32 U3.33

## Polygon pours and split planes (outlines as drawn)
GND on Top Layer "Top Layer-No Net" (solid, pour order 58): 6.121,-40.919 -0.076,-40.919 -2.134,-38.862 -0.523,-37.251 -0.523,-15.367 17.043,-15.367 17.628,-14.783
GND on Top Layer "Top Layer-No Net" (solid, pour order 56): 16.995,-15.964 16.995,-37.716 12.954,-41.758 5.791,-41.758
GND on Top Layer "Top Layer-No Net" (solid, pour order 42): 45.259,-10.414 45.259,-15.718 45.263,-15.723 44.503,-16.483 0.178,-16.483 0.178,-9.322 0.787,-8.712
GND on Top Layer "Top Layer-No Net" (solid, pour order 40): -5.561,-10.414 -5.715,-10.568 -5.715,-41.631 -0.178,-41.631 0.127,-41.935 0.178,-41.885 0.178,-9.322